# Altium PCB 数粒机接收板12通道.PcbDoc (part 1 of 2)
Units mil, origin at the board's own origin, x right, y up, seen from the top; angles counter-clockwise.
Board outline 12834.65 x 2362.2 mil, 2 copper layers (Top Layer, Bottom Layer); 305 components, 115 nets, 805 pads, 274 vias.
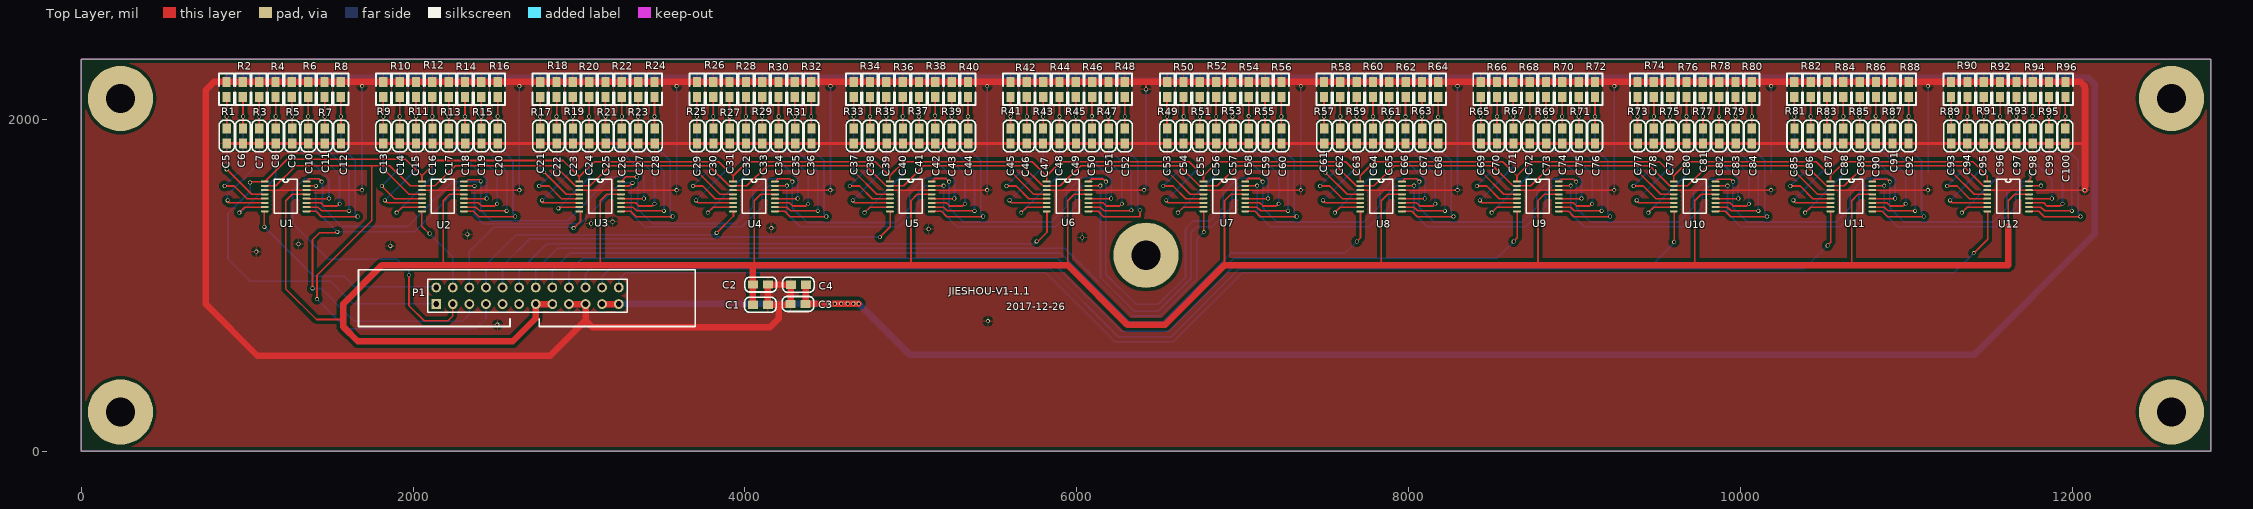
[diagram p0: Top Layer view]
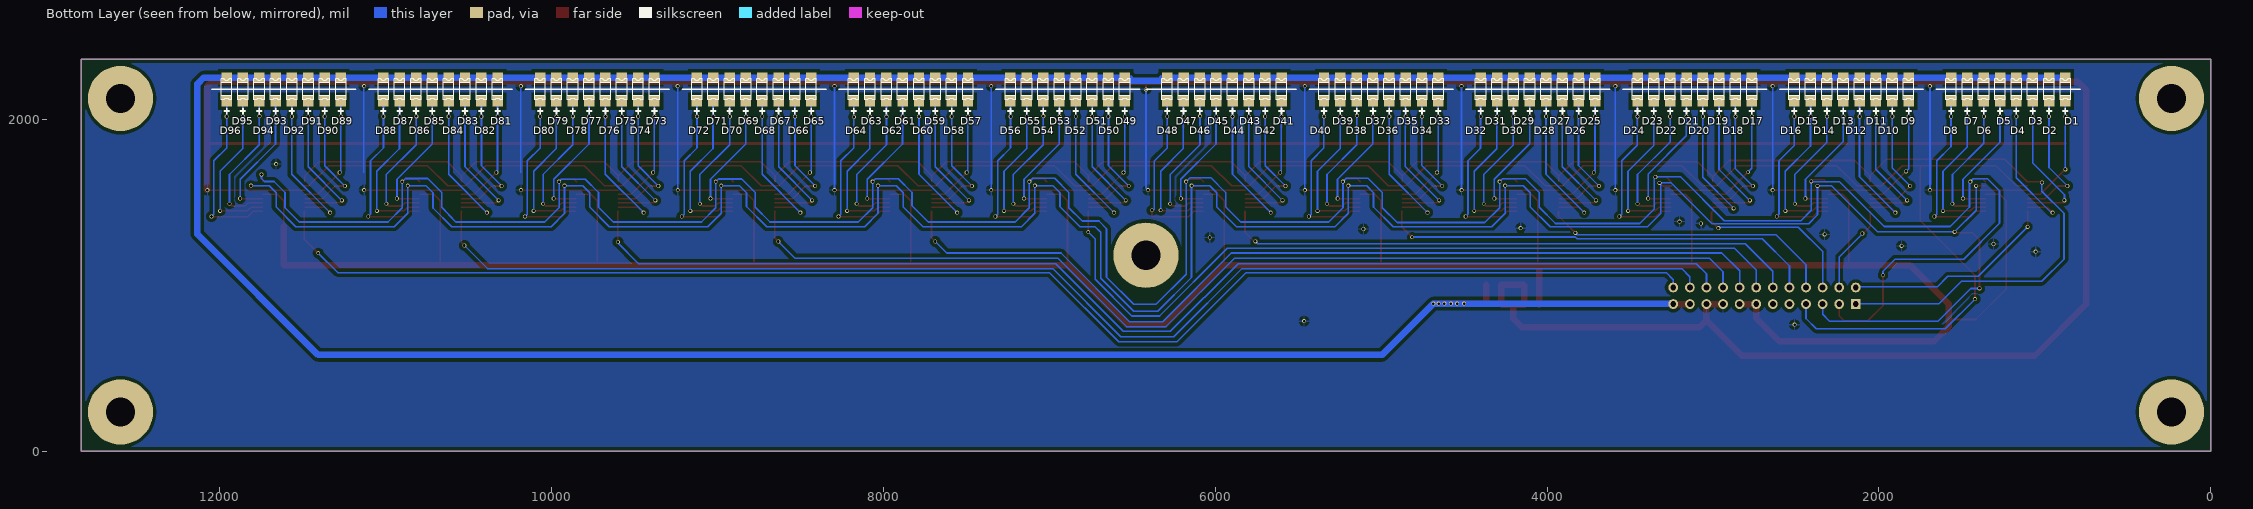
[diagram p1: Bottom Layer view, seen from below]

## Layer stack, top to bottom
Top Layer: signal copper 1.4
Dielectric: dielectric 12.6, FR-4, Dk 4.8
Bottom Layer: signal copper 1.4

## Board outline
12834.65,2362.2 0,2362.2 0,0 12834.65,0

## Design rules (kind name [scope] priority, off if disabled: settings)
Clearance Clearance_1 [InPolygon] p1: gap=20
Clearance [All] p2: gap=7.87
HoleSize [All] p1 off: absolutevalues=TRUE maxlimit=100 minlimit=1 maxpercent=80.000 minpercent=20.000
MinimumSolderMaskSliver [All] p1 off: minsoldermaskwidth=7.87
PolygonConnect [All] p1: connectstyle=Relief reliefconductorwidth=10 reliefentries=4 polygonreliefangle="90 Angle"
RoutingVias [All] p1: holewidth=10 width=23.62 viastyle="Through Hole" minholewidth=10 minwidth=23.62 maxholewidth=10 maxwidth=23.62
SilkToSilkClearance [All] p1: silktosilkclearance=-393.7
SilkscreenOverComponentPads [All] p1: minsilkscreentomaskgap=0
SolderMaskExpansion [All] p1: expansion=4
TestPointUsage [All] p1: valid=0 allowmultiple=FALSE
Testpoint [All] p1: side=3 testpointundercomponent=TRUE minsize=40 maxsize=100 preferedsize=60 minholesize=0 maxholesize=40 preferedholesize=32 testpointgrid=1 style=297 order=0-112345678
Width [All] p1: maxlimit=78.74 minlimit=10 preferedwidth=10
20 further rules are at their usual default settings.

## Components (designator, comment, footprint, x,y, rotation, side; value= is the part's Value field where it differs from the comment)
C1 "贴片电容 10uf" 0805c 4137.86,882.32 r180 top
C2 "贴片电容 0.1uf" 0805c 4139.86,1004.32 r180 top
C3 "贴片电容 10uf" 0805c 4274.86,887.32 r0 top
C4 "贴片电容 0.1uf" 0805c 4276.86,1003.32 r0 top
C5 "贴片电容 0.1uf" 0805c 876.78,1855 r90 top
C6 "贴片电容 0.1uf" 0805c 975.2,1855 r90 top
C7 "贴片电容 0.1uf" 0805c 1073.63,1855 r90 top
C8 "贴片电容 0.1uf" 0805c 1172.05,1855 r90 top
C9 "贴片电容 0.1uf" 0805c 1271,1855 r90 top
C10 "贴片电容 0.1uf" 0805c 1368.9,1855 r90 top
C11 "贴片电容 0.1uf" 0805c 1467.33,1855 r90 top
C12 "贴片电容 0.1uf" 0805c 1565.75,1855 r90 top
C13 "贴片电容 0.1uf" 0805c 1820.67,1855 r90 top
C14 "贴片电容 0.1uf" 0805c 1920.12,1855 r90 top
C15 "贴片电容 0.1uf" 0805c 2018.12,1855 r90 top
C16 "贴片电容 0.1uf" 0805c 2117.12,1855 r90 top
C17 "贴片电容 0.1uf" 0805c 2215.12,1855 r90 top
C18 "贴片电容 0.1uf" 0805c 2314.12,1855 r90 top
C19 "贴片电容 0.1uf" 0805c 2412.12,1855 r90 top
C20 "贴片电容 0.1uf" 0805c 2510.12,1855 r90 top
C21 "贴片电容 0.1uf" 0805c 2766.12,1855 r90 top
C22 "贴片电容 0.1uf" 0805c 2865.12,1855 r90 top
C23 "贴片电容 0.1uf" 0805c 2964.12,1855 r90 top
C24 "贴片电容 0.1uf" 0805c 3062.12,1855 r90 top
C25 "贴片电容 0.1uf" 0805c 3160.56,1855 r90 top
C26 "贴片电容 0.1uf" 0805c 3258.12,1855 r90 top
C27 "贴片电容 0.1uf" 0805c 3357.03,1855 r90 top
C28 "贴片电容 0.1uf" 0805c 3456.03,1855 r90 top
C29 "贴片电容 0.1uf" 0805c 3711.42,1855 r90 top
C30 "贴片电容 0.1uf" 0805c 3810.12,1855 r90 top
C31 "贴片电容 0.1uf" 0805c 3908.12,1855 r90 top
C32 "贴片电容 0.1uf" 0805c 4006.3,1855 r90 top
C33 "贴片电容 0.1uf" 0805c 4105.12,1855 r90 top
C34 "贴片电容 0.1uf" 0805c 4204.12,1855 r90 top
C35 "贴片电容 0.1uf" 0805c 4303.12,1855 r90 top
C36 "贴片电容 0.1uf" 0805c 4401.12,1855 r90 top
C37 "贴片电容 0.1uf" 0805c 4656.3,1855 r90 top
C38 "贴片电容 0.1uf" 0805c 4755.12,1855 r90 top
C39 "贴片电容 0.1uf" 0805c 4854.12,1855 r90 top
C40 "贴片电容 0.1uf" 0805c 4952.12,1855 r90 top
C41 "贴片电容 0.1uf" 0805c 5050.19,1855 r90 top
C42 "贴片电容 0.1uf" 0805c 5147.12,1855 r90 top
C43 "贴片电容 0.1uf" 0805c 5247.19,1855 r90 top
C44 "贴片电容 0.1uf" 0805c 5345.12,1855 r90 top
C45 "贴片电容 0.1uf" 0805c 5601.19,1855 r90 top
C46 "贴片电容 0.1uf" 0805c 5698.07,1855 r90 top
C47 "贴片电容 0.1uf" 0805c 5797.07,1855 r90 top
C48 "贴片电容 0.1uf" 0805c 5896.07,1855 r90 top
C49 "贴片电容 0.1uf" 0805c 5995.07,1855 r90 top
C50 "贴片电容 0.1uf" 0805c 6092.07,1855 r90 top
C51 "贴片电容 0.1uf" 0805c 6192.07,1855 r90 top
C52 "贴片电容 0.1uf" 0805c 6289.07,1855 r90 top
C53 "贴片电容 0.1uf" 0805c 6546.07,1855 r90 top
C54 "贴片电容 0.1uf" 0805c 6642.95,1855 r90 top
C55 "贴片电容 0.1uf" 0805c 6741.95,1855 r90 top
C56 "贴片电容 0.1uf" 0805c 6840.95,1855 r90 top
C57 "贴片电容 0.1uf" 0805c 6939.95,1855 r90 top
C58 "贴片电容 0.1uf" 0805c 7036.95,1855 r90 top
C59 "贴片电容 0.1uf" 0805c 7136.95,1855 r90 top
C60 "贴片电容 0.1uf" 0805c 7233.95,1855 r90 top
C61 "贴片电容 0.1uf" 0805c 7490.95,1855 r90 top
C62 "贴片电容 0.1uf" 0805c 7587.83,1855 r90 top
C63 "贴片电容 0.1uf" 0805c 7686.83,1855 r90 top
C64 "贴片电容 0.1uf" 0805c 7785.83,1855 r90 top
C65 "贴片电容 0.1uf" 0805c 7884.83,1855 r90 top
C66 "贴片电容 0.1uf" 0805c 7981.83,1855 r90 top
C67 "贴片电容 0.1uf" 0805c 8081.83,1855 r90 top
C68 "贴片电容 0.1uf" 0805c 8178.83,1855 r90 top
C69 "贴片电容 0.1uf" 0805c 8435.83,1855 r90 top
C70 "贴片电容 0.1uf" 0805c 8532.71,1855 r90 top
C71 "贴片电容 0.1uf" 0805c 8631.71,1855 r90 top
C72 "贴片电容 0.1uf" 0805c 8730.71,1855 r90 top
C73 "贴片电容 0.1uf" 0805c 8829.71,1855 r90 top
C74 "贴片电容 0.1uf" 0805c 8926.71,1855 r90 top
C75 "贴片电容 0.1uf" 0805c 9026.71,1855 r90 top
C76 "贴片电容 0.1uf" 0805c 9123.71,1855 r90 top
C77 "贴片电容 0.1uf" 0805c 9380.71,1855 r90 top
C78 "贴片电容 0.1uf" 0805c 9477.6,1855 r90 top
C79 "贴片电容 0.1uf" 0805c 9576.6,1855 r90 top
C80 "贴片电容 0.1uf" 0805c 9675.6,1855 r90 top
C81 "贴片电容 0.1uf" 0805c 9774.6,1855 r90 top
C82 "贴片电容 0.1uf" 0805c 9871.6,1855 r90 top
C83 "贴片电容 0.1uf" 0805c 9971.6,1855 r90 top
C84 "贴片电容 0.1uf" 0805c 10068.6,1855 r90 top
C85 "贴片电容 0.1uf" 0805c 10325.6,1855 r90 top
C86 "贴片电容 0.1uf" 0805c 10422.48,1855 r90 top
C87 "贴片电容 0.1uf" 0805c 10521.48,1855 r90 top
C88 "贴片电容 0.1uf" 0805c 10620.48,1855 r90 top
C89 "贴片电容 0.1uf" 0805c 10719.48,1855 r90 top
C90 "贴片电容 0.1uf" 0805c 10816.48,1855 r90 top
C91 "贴片电容 0.1uf" 0805c 10916.48,1855 r90 top
C92 "贴片电容 0.1uf" 0805c 11013.48,1855 r90 top
C93 "贴片电容 0.1uf" 0805c 11270.48,1855 r90 top
C94 "贴片电容 0.1uf" 0805c 11367.36,1855 r90 top
C95 "贴片电容 0.1uf" 0805c 11466.36,1855 r90 top
C96 "贴片电容 0.1uf" 0805c 11565.36,1855 r90 top
C97 "贴片电容 0.1uf" 0805c 11664.36,1855 r90 top
C98 "贴片电容 0.1uf" 0805c 11761.36,1855 r90 top
C99 "贴片电容 0.1uf" 0805c 11861.36,1855 r90 top
C100 "贴片电容 0.1uf" 0805c 11958.36,1855 r90 top
D1 "红外接收珠子" jieshou1206 875.98,2110.24 r0 bottom
D2 "红外接收珠子" jieshou1206 974.41,2110.24 r0 bottom
D3 "红外接收珠子" jieshou1206 1072.83,2110.24 r0 bottom
D4 "红外接收珠子" jieshou1206 1171.26,2110.24 r0 bottom
D5 "红外接收珠子" jieshou1206 1269.68,2110.24 r0 bottom
D6 "红外接收珠子" jieshou1206 1368.11,2110.24 r0 bottom
D7 "红外接收珠子" jieshou1206 1466.53,2110.24 r0 bottom
D8 "红外接收珠子" jieshou1206 1564.96,2110.24 r0 bottom
D9 "红外接收珠子" jieshou1206 1820.87,2110.24 r0 bottom
D10 "红外接收珠子" jieshou1206 1919.29,2110.24 r0 bottom
D11 "红外接收珠子" jieshou1206 2017.72,2110.24 r0 bottom
D12 "红外接收珠子" jieshou1206 2116.14,2110.24 r0 bottom
D13 "红外接收珠子" jieshou1206 2214.57,2110.24 r0 bottom
D14 "红外接收珠子" jieshou1206 2312.99,2110.24 r0 bottom
D15 "红外接收珠子" jieshou1206 2411.42,2110.24 r0 bottom
D16 "红外接收珠子" jieshou1206 2509.84,2110.24 r0 bottom
D17 "红外接收珠子" jieshou1206 2765.75,2110.24 r0 bottom
D18 "红外接收珠子" jieshou1206 2864.17,2110.24 r0 bottom
D19 "红外接收珠子" jieshou1206 2962.6,2110.24 r0 bottom
D20 "红外接收珠子" jieshou1206 3061.02,2110.24 r0 bottom
D21 "红外接收珠子" jieshou1206 3159.45,2110.24 r0 bottom
D22 "红外接收珠子" jieshou1206 3257.87,2110.24 r0 bottom
D23 "红外接收珠子" jieshou1206 3356.3,2110.24 r0 bottom
D24 "红外接收珠子" jieshou1206 3454.72,2110.24 r0 bottom
D25 "红外接收珠子" jieshou1206 3710.63,2110.24 r0 bottom
D26 "红外接收珠子" jieshou1206 3809.05,2110.24 r0 bottom
D27 "红外接收珠子" jieshou1206 3907.48,2110.24 r0 bottom
D28 "红外接收珠子" jieshou1206 4005.91,2110.24 r0 bottom
D29 "红外接收珠子" jieshou1206 4104.33,2110.24 r0 bottom
D30 "红外接收珠子" jieshou1206 4202.76,2110.24 r0 bottom
D31 "红外接收珠子" jieshou1206 4301.18,2110.24 r0 bottom
D32 "红外接收珠子" jieshou1206 4399.61,2110.24 r0 bottom
D33 "红外接收珠子" jieshou1206 4655.51,2110.24 r0 bottom
D34 "红外接收珠子" jieshou1206 4753.94,2110.24 r0 bottom
D35 "红外接收珠子" jieshou1206 4852.36,2110.24 r0 bottom
D36 "红外接收珠子" jieshou1206 4950.79,2110.24 r0 bottom
D37 "红外接收珠子" jieshou1206 5049.21,2110.24 r0 bottom
D38 "红外接收珠子" jieshou1206 5147.64,2110.24 r0 bottom
D39 "红外接收珠子" jieshou1206 5246.06,2110.24 r0 bottom
D40 "红外接收珠子" jieshou1206 5344.49,2110.24 r0 bottom
D41 "红外接收珠子" jieshou1206 5600.39,2110.24 r0 bottom
D42 "红外接收珠子" jieshou1206 5698.82,2110.24 r0 bottom
D43 "红外接收珠子" jieshou1206 5797.24,2110.24 r0 bottom
D44 "红外接收珠子" jieshou1206 5895.67,2110.24 r0 bottom
D45 "红外接收珠子" jieshou1206 5994.09,2110.24 r0 bottom
D46 "红外接收珠子" jieshou1206 6092.52,2110.24 r0 bottom
D47 "红外接收珠子" jieshou1206 6190.94,2110.24 r0 bottom
D48 "红外接收珠子" jieshou1206 6289.37,2110.24 r0 bottom
D49 "红外接收珠子" jieshou1206 6545.28,2110.24 r0 bottom
D50 "红外接收珠子" jieshou1206 6643.7,2110.24 r0 bottom
D51 "红外接收珠子" jieshou1206 6742.13,2110.24 r0 bottom
D52 "红外接收珠子" jieshou1206 6840.55,2110.24 r0 bottom
D53 "红外接收珠子" jieshou1206 6938.98,2110.24 r0 bottom
D54 "红外接收珠子" jieshou1206 7037.4,2110.24 r0 bottom
D55 "红外接收珠子" jieshou1206 7135.83,2110.24 r0 bottom
D56 "红外接收珠子" jieshou1206 7234.25,2110.24 r0 bottom
D57 "红外接收珠子" jieshou1206 7490.16,2110.24 r0 bottom
D58 "红外接收珠子" jieshou1206 7588.58,2110.24 r0 bottom
D59 "红外接收珠子" jieshou1206 7687.01,2110.24 r0 bottom
D60 "红外接收珠子" jieshou1206 7785.43,2110.24 r0 bottom
D61 "红外接收珠子" jieshou1206 7883.86,2110.24 r0 bottom
D62 "红外接收珠子" jieshou1206 7982.28,2110.24 r0 bottom
D63 "红外接收珠子" jieshou1206 8080.71,2110.24 r0 bottom
D64 "红外接收珠子" jieshou1206 8179.13,2110.24 r0 bottom
D65 "红外接收珠子" jieshou1206 8435.04,2110.24 r0 bottom
D66 "红外接收珠子" jieshou1206 8533.46,2110.24 r0 bottom
D67 "红外接收珠子" jieshou1206 8631.89,2110.24 r0 bottom
D68 "红外接收珠子" jieshou1206 8730.32,2110.24 r0 bottom
D69 "红外接收珠子" jieshou1206 8828.74,2110.24 r0 bottom
D70 "红外接收珠子" jieshou1206 8927.17,2110.24 r0 bottom
D71 "红外接收珠子" jieshou1206 9025.59,2110.24 r0 bottom
D72 "红外接收珠子" jieshou1206 9124.02,2110.24 r0 bottom
D73 "红外接收珠子" jieshou1206 9379.92,2110.24 r0 bottom
D74 "红外接收珠子" jieshou1206 9478.35,2110.24 r0 bottom
D75 "红外接收珠子" jieshou1206 9576.77,2110.24 r0 bottom
D76 "红外接收珠子" jieshou1206 9675.2,2110.24 r0 bottom
D77 "红外接收珠子" jieshou1206 9773.62,2110.24 r0 bottom
D78 "红外接收珠子" jieshou1206 9872.05,2110.24 r0 bottom
D79 "红外接收珠子" jieshou1206 9970.47,2110.24 r0 bottom
D80 "红外接收珠子" jieshou1206 10068.9,2110.24 r0 bottom
D81 "红外接收珠子" jieshou1206 10324.8,2110.24 r0 bottom
D82 "红外接收珠子" jieshou1206 10423.23,2110.24 r0 bottom
D83 "红外接收珠子" jieshou1206 10521.65,2110.24 r0 bottom
D84 "红外接收珠子" jieshou1206 10620.08,2110.24 r0 bottom
D85 "红外接收珠子" jieshou1206 10718.5,2110.24 r0 bottom
D86 "红外接收珠子" jieshou1206 10816.93,2110.24 r0 bottom
D87 "红外接收珠子" jieshou1206 10915.35,2110.24 r0 bottom
D88 "红外接收珠子" jieshou1206 11013.78,2110.24 r0 bottom
D89 "红外接收珠子" jieshou1206 11269.69,2110.24 r0 bottom
D90 "红外接收珠子" jieshou1206 11368.11,2110.24 r0 bottom
D91 "红外接收珠子" jieshou1206 11466.54,2110.24 r0 bottom
D92 "红外接收珠子" jieshou1206 11564.96,2110.24 r0 bottom
D93 "红外接收珠子" jieshou1206 11663.39,2110.24 r0 bottom
D94 "红外接收珠子" jieshou1206 11761.81,2110.24 r0 bottom
D95 "红外接收珠子" jieshou1206 11860.24,2110.24 r0 bottom
D96 "红外接收珠子" jieshou1206 11958.66,2110.24 r0 bottom
P1 "牛角插座" HDR2X12 2139.3,886.61 r0 top
R1 "贴片电阻" 0805r 875.67,2226.1 r270 top
R2 "贴片电阻" 0805r 974.1,2226.1 r270 top
R3 "贴片电阻" 0805r 1072.52,2226.1 r270 top
R4 "贴片电阻" 0805r 1170.95,2226.1 r270 top
R5 "贴片电阻" 0805r 1269.37,2226.1 r270 top
R6 "贴片电阻" 0805r 1367.8,2226.1 r270 top
R7 "贴片电阻" 0805r 1466.22,2226.1 r270 top
R8 "贴片电阻" 0805r 1564.65,2226.1 r270 top
R9 "贴片电阻" 0805r 1820.87,2226.1 r270 top
R10 "贴片电阻" 0805r 1919.29,2226.1 r270 top
R11 "贴片电阻" 0805r 2017.72,2226.1 r270 top
R12 "贴片电阻" 0805r 2116.14,2226.1 r270 top
R13 "贴片电阻" 0805r 2214.57,2226.1 r270 top
R14 "贴片电阻" 0805r 2312.99,2226.1 r270 top
R15 "贴片电阻" 0805r 2411.42,2226.1 r270 top
R16 "贴片电阻" 0805r 2509.84,2226.1 r270 top
R17 "贴片电阻" 0805r 2765.75,2226.1 r270 top
R18 "贴片电阻" 0805r 2864.17,2226.1 r270 top
R19 "贴片电阻" 0805r 2962.6,2226.1 r270 top
R20 "贴片电阻" 0805r 3061.02,2226.1 r270 top
R21 "贴片电阻" 0805r 3159.45,2226.1 r270 top
R22 "贴片电阻" 0805r 3257.87,2226.1 r270 top
R23 "贴片电阻" 0805r 3356.3,2226.1 r270 top
R24 "贴片电阻" 0805r 3454.72,2226.1 r270 top
R25 "贴片电阻" 0805r 3710.63,2226.1 r270 top
R26 "贴片电阻" 0805r 3809.05,2226.1 r270 top
R27 "贴片电阻" 0805r 3907.48,2226.1 r270 top
R28 "贴片电阻" 0805r 4005.9,2226.1 r270 top
R29 "贴片电阻" 0805r 4104.33,2226.1 r270 top
R30 "贴片电阻" 0805r 4202.76,2226.1 r270 top
R31 "贴片电阻" 0805r 4301.18,2226.1 r270 top
R32 "贴片电阻" 0805r 4399.61,2226.1 r270 top
R33 "贴片电阻" 0805r 4655.51,2226.1 r270 top
R34 "贴片电阻" 0805r 4753.94,2226.1 r270 top
R35 "贴片电阻" 0805r 4852.36,2226.1 r270 top
R36 "贴片电阻" 0805r 4950.79,2226.1 r270 top
R37 "贴片电阻" 0805r 5049.21,2226.1 r270 top
R38 "贴片电阻" 0805r 5147.64,2226.1 r270 top
R39 "贴片电阻" 0805r 5246.06,2226.1 r270 top
R40 "贴片电阻" 0805r 5344.49,2226.1 r270 top
R41 "贴片电阻" 0805r 5600.39,2226.1 r270 top
R42 "贴片电阻" 0805r 5698.82,2226.1 r270 top
R43 "贴片电阻" 0805r 5797.24,2226.1 r270 top
R44 "贴片电阻" 0805r 5895.67,2226.1 r270 top
R45 "贴片电阻" 0805r 5994.09,2226.1 r270 top
R46 "贴片电阻" 0805r 6092.52,2226.1 r270 top
R47 "贴片电阻" 0805r 6190.94,2226.1 r270 top
R48 "贴片电阻" 0805r 6289.37,2226.1 r270 top
R49 "贴片电阻" 0805r 6545.28,2226.1 r270 top
R50 "贴片电阻" 0805r 6643.7,2226.1 r270 top
R51 "贴片电阻" 0805r 6742.13,2226.1 r270 top
R52 "贴片电阻" 0805r 6840.55,2226.1 r270 top
R53 "贴片电阻" 0805r 6938.98,2226.1 r270 top
R54 "贴片电阻" 0805r 7037.4,2226.1 r270 top
R55 "贴片电阻" 0805r 7135.83,2226.1 r270 top
R56 "贴片电阻" 0805r 7234.25,2226.1 r270 top
R57 "贴片电阻" 0805r 7490.16,2226.1 r270 top
R58 "贴片电阻" 0805r 7588.58,2226.1 r270 top
R59 "贴片电阻" 0805r 7687.01,2226.1 r270 top
R60 "贴片电阻" 0805r 7785.43,2226.1 r270 top
R61 "贴片电阻" 0805r 7883.86,2226.1 r270 top
R62 "贴片电阻" 0805r 7982.28,2226.1 r270 top
R63 "贴片电阻" 0805r 8080.71,2226.1 r270 top
R64 "贴片电阻" 0805r 8179.13,2226.1 r270 top
R65 "贴片电阻" 0805r 8434.73,2226.1 r270 top
R66 "贴片电阻" 0805r 8533.15,2226.1 r270 top
R67 "贴片电阻" 0805r 8631.58,2226.1 r270 top
R68 "贴片电阻" 0805r 8730,2226.1 r270 top
R69 "贴片电阻" 0805r 8828.43,2226.1 r270 top
R70 "贴片电阻" 0805r 8926.85,2226.1 r270 top
R71 "贴片电阻" 0805r 9025.28,2226.1 r270 top
R72 "贴片电阻" 0805r 9123.7,2226.1 r270 top
R73 "贴片电阻" 0805r 9379.92,2226.1 r270 top
R74 "贴片电阻" 0805r 9478.35,2226.1 r270 top
R75 "贴片电阻" 0805r 9576.77,2226.1 r270 top
R76 "贴片电阻" 0805r 9675.2,2226.1 r270 top
R77 "贴片电阻" 0805r 9773.62,2226.1 r270 top
R78 "贴片电阻" 0805r 9872.05,2226.1 r270 top
R79 "贴片电阻" 0805r 9970.47,2226.1 r270 top
R80 "贴片电阻" 0805r 10068.9,2226.1 r270 top
R81 "贴片电阻" 0805r 10324.8,2226.1 r270 top
R82 "贴片电阻" 0805r 10423.23,2226.1 r270 top
R83 "贴片电阻" 0805r 10521.65,2226.1 r270 top
R84 "贴片电阻" 0805r 10620.08,2226.1 r270 top
R85 "贴片电阻" 0805r 10718.5,2226.1 r270 top
R86 "贴片电阻" 0805r 10816.93,2226.1 r270 top
R87 "贴片电阻" 0805r 10915.35,2226.1 r270 top
R88 "贴片电阻" 0805r 11013.78,2226.1 r270 top
R89 "贴片电阻" 0805r 11269.69,2226.1 r270 top
R90 "贴片电阻" 0805r 11368.11,2226.1 r270 top
R91 "贴片电阻" 0805r 11466.54,2226.1 r270 top
R92 "贴片电阻" 0805r 11564.96,2226.1 r270 top
R93 "贴片电阻" 0805r 11663.39,2226.1 r270 top
R94 "贴片电阻" 0805r 11761.81,2226.1 r270 top
R95 "贴片电阻" 0805r 11860.24,2226.1 r270 top
R96 "贴片电阻" 0805r 11958.66,2226.1 r270 top
U1 "集成电路" TSSOP16 1105.86,1624.72 r0 top
U2 "集成电路" TSSOP16 2053.86,1624.72 r0 top
U3 "集成电路" TSSOP16 3001.86,1624.72 r0 top
U4 "集成电路" TSSOP16 3928.86,1624.72 r0 top
U5 "集成电路" TSSOP16 4873.74,1624.72 r0 top
U6 "集成电路" TSSOP16 5818.63,1624.72 r0 top
U7 "集成电路" TSSOP16 6763.51,1624.72 r0 top
U8 "集成电路" TSSOP16 7708.39,1624.72 r0 top
U9 "集成电路" TSSOP16 8653.27,1624.72 r0 top
U10 "集成电路" TSSOP16 9598.15,1624.72 r0 top
U11 "集成电路" TSSOP16 10543.04,1624.72 r0 top
U12 "集成电路" TSSOP16 11487.92,1624.72 r0 top

## Footprints (in the part's own frame and the unit in brackets; to place one, negate y for a bottom-side part, rotate by r counter-clockwise, add the part's x,y. Pads: shape width x height; smd on the part's side, far side on the other; paste and mask are expansions set on the pad)
0805c [mil]
  rect 60x50 smd: 1(0,0) 2(90,0)
  silkscreen extent -50,-45 140,45
0805r [mil]
  rect 60x50 smd: 1(0,0) 2(90,0)
  silkscreen extent -50,-45 140,45
HDR2X12 [mm] "Connector; Header; 12x2 Position"
  rect 1.5x1.5 hole 0.9: 1(0,0)
  round 1.5 hole 0.9: 2(0,2.54) 3(2.54,0) 4(2.54,2.54) 5(5.08,0) 6(5.08,2.54) 7(7.62,0) 8(7.62,2.54) 9(10.16,0) 10(10.16,2.54) 11(12.7,0) 12(12.7,2.54) 13(15.24,0) 14(15.24,2.54) 15(17.78,0) 16(17.78,2.54) 17(20.32,0) 18(20.32,2.54) 19(22.86,0) 20(22.86,2.54) 21(25.4,0) 22(25.4,2.54) 23(27.94,0) 24(27.94,2.54)
  silkscreen extent -1.27,-1.27 29.21,3.81
jieshou1206 [mm]
  rect 1.6x1.6 smd: 1(0,0) 2(0,-3.6)
  silkscreen extent -0.8,-3.41 0.82,1.9
TSSOP16 [mm] "ADG708"
  rect 1.2x0.3 smd: 1(0,0)
  oval 1.2x0.3 smd: 2(0,-0.65) 3(0,-1.3) 4(0,-1.95) 5(0,-2.6) 6(0,-3.25) 7(0,-3.9) 8(0,-4.55) 9(6.4,-4.55) 10(6.4,-3.9) 11(6.4,-3.25) 12(6.4,-2.6) 13(6.4,-1.95) 14(6.4,-1.3) 15(6.4,-0.65) 16(6.4,0)
  silkscreen extent 1.43,-4.88 4.96,0.33

## Part data
C1 C2 C3 C4: library part Cap, "Capacitor"
C5 C6 C7 C8 C9 C10 C11 C12 C13 C14 C15 C16 C17 C18 C19 C20 C21 C22 C23 C24 C25 C26 C27 C28 C29 C30 C31 C32 C33 C34 C35 C36 C37 C38 C39 C40 C41 C42 C43 C44 C45 C46 C47 C48 C49 C50 C51 C52 C53 C54 C55 C56 C57 C58 C59 C60 C61 C62 C63 C64 C65 C66 C67 C68 C69 C70 C71 C72 C73 C74 C75 C76 C77 C78 C79 C80 C81 C82 C83 C84 C85 C86 C87 C88 C89 C90 C91 C92 C93 C94 C95 C96 C97 C98 C99 C100: library part Cap, "Capacitor 0.1uf"
D1 D2 D3 D4 D5 D6 D7 D8 D9 D10 D11 D12 D13 D14 D15 D16 D17 D18 D19 D20 D21 D22 D23 D24 D25 D26 D27 D28 D29 D30 D31 D32 D33 D34 D35 D36 D37 D38 D39 D40 D41 D42 D43 D44 D45 D46 D47 D48 D49 D50 D51 D52 D53 D54 D55 D56 D57 D58 D59 D60 D61 D62 D63 D64 D65 D66 D67 D68 D69 D70 D71 D72 D73 D74 D75 D76 D77 D78 D79 D80 D81 D82 D83 D84 D85 D86 D87 D88 D89 D90 D91 D92 D93 D94 D95 D96: library part LED0, "PD15-21B/TR8"
P1: library part "Header 12X2", "Header, 12-Pin, Dual row"
R1 R2 R3 R4 R5 R6 R7 R8 R9 R10 R11 R12 R13 R14 R15 R16 R17 R18 R19 R20 R21 R22 R23 R24 R25 R26 R27 R28 R29 R30 R31 R32: library part Res3
R33 R34 R35 R36 R37 R38 R39 R40 R41 R42 R43 R44 R45 R46 R47 R48 R49 R50 R51 R52 R53 R54 R55 R56 R57 R58 R59 R60 R61 R62 R63 R64 R65 R66 R67 R68 R69 R70 R71 R72 R73 R74 R75 R76 R77 R78 R79 R80 R81 R82 R83 R84 R85 R86 R87 R88 R89 R90 R91 R92 R93 R94 R95 R96: library part Res3, "电阻"
U1 U2 U3 U4: library part ADG708
U5 U6 U7 U8 U9 U10 U11 U12: library part ADG708, "ADG708BRU-REEL"

## Free pads (board coordinates)
  round 393.7 hole 177.17 unplated: 1(236.22,2125.98) 2(236.22,236.22) 2(6417.32,1181.1) 5(12598.43,2125.98) 6(12598.43,236.22)

## Via types
v1: diameter 23.62, hole 15.75, Top Layer to Bottom Layer, 274 vias

## Nets (pads, with @x,y where several pads share a name; then routed paths per layer and width w, separated by ;. In a path a pad name is that pad's centre, name@x,y a point inside that pad or via, vN(x,y) a via of type N, cw(c..) or ccw(c..) an arc to the next point about the centre after c; other vN are vias at no path point)
A0: P1.1 U1.1 U2.1 U3.1 U4.1 U5.1 U6.1 U7.1 U8.1 U9.1 U10.1 U11.1 U12.1 | length 13806.2
  Top Layer w10: v1(1016.86,1619.32) 1022.26,1624.72 U1.1@1105.86,1624.72 1241.46,1760.32 1953.86,1760.32 2053.86,1660.32 ; U2.1@2053.86,1624.72 2053.86,1660.32 ; U3.1@3001.86,1624.72 3001.86,1654.32 ; U4.1@3928.86,1624.72 3928.86,1660.17 4014.01,1745.32 4787.48,1745.32 4873.74,1659.05 ; 3928.86,1659.05 3842.6,1745.32 3092.86,1745.32 3001.86,1654.32 ; 5818.63,1659.05 5732.36,1745.32 4958.89,1745.32 4873.74,1660.17 ; 6763.51,1659.05 6677.24,1745.32 5903.78,1745.32 5818.63,1660.17 ; 7708.39,1659.05 7622.12,1745.32 6848.66,1745.32 6763.51,1660.17 ; 8653.27,1659.05 8567.01,1745.32 7793.54,1745.32 7708.39,1660.17 ; 9598.15,1659.05 9511.89,1745.32 8738.42,1745.32 8653.27,1660.17 ; 10543.04,1659.05 10456.77,1745.32 9683.3,1745.32 9598.15,1660.17 ; U12.1@11487.92,1624.72 11487.92,1660.17 ; 11487.92,1659.05 11401.65,1745.32 10628.19,1745.32 10543.04,1660.17 ; 2053.86,1660.32 2145.86,1752.32 2903.86,1752.32 3001.86,1654.32 ; 4873.74,1660.17 U5.1@4873.74,1624.72 4873.74,1660.17 ; 5818.63,1660.17 U6.1@5818.63,1624.72 5818.63,1660.17 ; 6763.51,1660.17 U7.1@6763.51,1624.72 6763.51,1660.17 ; 7708.39,1660.17 U8.1@7708.39,1624.72 7708.39,1660.17 ; 8653.27,1660.17 U9.1@8653.27,1624.72 8653.27,1660.17 ; 9598.15,1660.17 U10.1@9598.15,1624.72 9598.15,1660.17 ; 10543.04,1660.17 U11.1@10543.04,1624.72 10543.04,1660.17
  Bottom Layer w10: v1(1016.86,1619.32) 1017.86,1618.32 1017.86,1567.32 884.86,1434.32 884.86,1157.32 1018.86,1023.32 1502.6,1023.32 1636.3,889.61 P1.1@2139.3,889.61
A1: P1.3 U1.16 U2.16 U3.16 U4.16 U5.16 U6.16 U7.16 U8.16 U9.16 U10.16 U11.16 U12.16 | length 18193
  Top Layer w10: U1.16@1357.83,1624.72 1374.59,1641.48 1431.7,1641.48 v1(1448.86,1624.32) ; v1(1975.3,1060.61) 1975.3,876.61 2066.3,785.61 2210.3,785.61 2239.3,814.61 P1.3@2239.3,886.61 ; U2.16@2305.83,1624.72 2320.36,1624.72 2331.12,1635.48 2398.12,1635.48 2405.46,1628.13 v1@2405.46,1624.72 ; U3.16@3253.83,1624.72 3283.59,1654.48 3345.12,1654.48 v1(3347.12,1652.48) ; U4.16@4180.83,1624.72 4197.59,1641.48 4268.7,1641.48 v1(4285.86,1624.32) ; U5.16@5125.71,1624.72 5144.47,1643.48 5211.59,1643.48 v1(5230.74,1624.32) ; U6.16@6070.59,1624.72 6086.35,1640.48 6159.47,1640.48 v1(6175.63,1624.32) ; U7.16@7015.48,1624.72 7034.23,1643.48 7101.35,1643.48 v1(7120.51,1624.32) ; U8.16@7960.36,1624.72 7977.11,1641.48 8048.23,1641.48 v1(8065.39,1624.32) ; U9.16@8905.24,1624.72 8919,1638.48 8996.11,1638.48 v1(9010.27,1624.32) ; U10.16@9850.12,1624.72 9863.88,1638.48 9941,1638.48 v1(9955.15,1624.32) ; U11.16@10795,1624.72 10809.76,1639.48 10884.88,1639.48 v1(10900.04,1624.32) ; U12.16@11739.89,1624.72 11739.89,1637.32 11749.22,1646.65 11749.22,1666.38 v1(11748.12,1667.48)
  Bottom Layer w10: v1(1975.3,1060.61) 1975.3,1085.17 1903.15,1157.32 1488.86,1157.32 1272.86,1373.32 1272.86,1569.32 1345.02,1641.48 1431.7,1641.48 v1(1448.86,1624.32) 1453.86,1619.32 1453.86,1471.32 1570.86,1354.32 1966.86,1354.32 2237.26,1624.72 2406.26,1624.72 v1(2407.86,1626.32) 2407.86,1451.32 2469.55,1389.63 2931.18,1389.63 3196.02,1654.48 3353.86,1654.48 3353.86,1459.32 3441.18,1372 3949.54,1372 4047.86,1470.32 4047.86,1559.32 4130.02,1641.48 4268.7,1641.48 v1@4285.46,1624.72 ; v1@4285.46,1624.32 v1@4285.46,1624.72 ; v1(5230.74,1624.32) v1@5230.34,1624.72 ; v1(6175.63,1624.32) v1@6175.22,1624.72 ; v1(7120.51,1624.32) v1@7120.11,1624.72 ; v1(8065.39,1624.32) v1@8064.99,1624.72 ; v1(9010.27,1624.32) v1@9009.87,1624.72 ; v1(9955.15,1624.32) v1@9954.75,1624.72 ; v1(10900.04,1624.32) v1@10899.63,1624.72 ; v1(11748.12,1667.48) 11748.59,1667 11748.59,1643.8 11729.8,1625 11672.6,1625 11606.92,1559.32 11606.92,1467.05 11521.48,1381.61 10985.74,1381.61 10899.63,1467.72 v1@10899.63,1624.72 ; v1@4285.46,1624.72 v1(4285.86,1624.32) 4285.86,1467.32 4375.18,1378 4903.69,1378 4992.74,1467.05 4992.74,1559.32 5078.9,1645.48 5209.59,1645.48 v1@5230.34,1624.72 ; v1@5230.34,1624.72 5230.34,1467.72 5316.45,1381.61 5846.3,1381.61 5937.63,1472.93 5937.63,1559.32 6025.78,1647.48 6152.47,1647.48 v1@6175.22,1624.72 ; v1@6175.22,1624.72 6175.22,1066.78 6357,885 6491,885 6655,1049 6655,1341 6701,1387 6801.56,1387 6882.51,1467.94 6882.51,1559.32 6967.67,1644.48 7100.35,1644.48 v1@7120.11,1624.72 ; v1@7120.11,1624.72 7120.11,1467.72 7206.22,1381.61 7730.3,1381.61 7827.39,1478.7 7827.39,1559.32 7910.55,1642.48 8047.23,1642.48 v1@8064.99,1624.72 ; v1@8064.99,1624.72 8064.99,1467.72 8151.1,1381.61 8683.3,1381.61 8772.27,1470.58 8772.27,1559.32 8853.43,1640.48 8994.11,1640.48 v1@9009.87,1624.72 ; v1@9009.87,1624.72 9009.87,1467.72 9095.98,1381.61 9628.3,1381.61 9717.15,1470.46 9717.15,1559.32 9796.31,1638.48 9941,1638.48 v1@9954.75,1624.72 ; v1@9954.75,1624.72 9954.75,1467.72 10040.86,1381.61 10576.6,1381.61 10662.04,1470.32 10662.04,1559.32 10746.19,1643.48 10880.88,1643.48 v1@10899.63,1624.72
A2: P1.5 U1.15 U2.15 U3.15 U4.15 U5.15 U6.15 U7.15 U8.15 U9.15 U10.15 U11.15 U12.15 | length 17454.2
  Top Layer w10: U1.15@1357.83,1599.13 v1(1413.67,1599.13) ; v1(1393.46,980.92) 1393.46,1274.77 1436.01,1317.32 1538.86,1317.32 v1(1543.86,1322.32) ; U2.15@2305.83,1599.13 v1(2369.86,1599.13) ; U3.15@3250.12,1598.48 3303.12,1598.48 v1(3322.12,1617.48) ; U4.15@4180.83,1599.13 4251.67,1599.13 v1(4252.86,1600.32) ; U5.15@5125.71,1599.13 5196.55,1599.13 v1(5197.74,1600.32) ; U6.15@6070.59,1599.13 6141.44,1599.13 v1(6142.63,1600.32) ; U7.15@7015.48,1599.13 7086.32,1599.13 v1(7087.51,1600.32) ; U8.15@7960.36,1599.13 8031.2,1599.13 v1(8032.39,1600.32) ; U9.15@8905.24,1599.13 8976.08,1599.13 v1(8977.27,1600.32) ; U10.15@9850.12,1599.13 9920.96,1599.13 v1(9922.15,1600.32) ; U11.15@10795,1599.13 10865.85,1599.13 v1(10867.04,1600.32) ; U12.15@11739.89,1599.13 11810.73,1599.13 v1(11811.92,1600.32)
  Bottom Layer w10: v1(1393.46,980.92) 1447,980.92 1644.3,783.61 2297.3,783.61 2339.3,825.61 P1.5@2339.3,886.61 ; v1(1413.67,1599.13) 1413.67,1452.51 v1(1543.86,1322.32) 2008.86,1322.32 2285.67,1599.13 v1(2369.86,1599.13) 2369.86,1424.32 2423.57,1370.61 3006.15,1370.61 3253.02,1617.48 v1(3322.12,1617.48) 3315.86,1611.22 3315.86,1430.32 3394.18,1352 3981.54,1352 4100.86,1471.32 4100.86,1557.32 4142.67,1599.13 4251.67,1599.13 v1(4252.86,1600.32) 4252.86,1433.32 4333.57,1352.61 4927.04,1352.61 5045.74,1471.32 5045.74,1557.32 5087.55,1599.13 5196.55,1599.13 v1(5197.74,1600.32) 5197.74,1433.32 5278.45,1352.61 5871.92,1352.61 5990.63,1471.32 5990.63,1557.32 6032.44,1599.13 6141.44,1599.13 v1(6142.63,1600.32) 6142.63,1047.37 6347,843 6491,843 6691,1043 6691,1319.49 6725,1353.49 6814.79,1353.49 6935.51,1474.21 6935.51,1557.32 6977.32,1599.13 7086.32,1599.13 v1(7087.51,1600.32) 7087.51,1433.32 7168.22,1352.61 7761.68,1352.61 7880.39,1471.32 7880.39,1557.32 7922.2,1599.13 8031.2,1599.13 v1(8032.39,1600.32) 8032.39,1433.32 8113.1,1352.61 8703.3,1352.61 8825.27,1474.58 8825.27,1557.32 8867.08,1599.13 8976.08,1599.13 v1(8977.27,1600.32) 8977.27,1433.32 9057.98,1352.61 9651.45,1352.61 9770.15,1471.32 9770.15,1557.32 9811.96,1599.13 9920.96,1599.13 v1(9922.15,1600.32) 9922.15,1433.32 10002.86,1352.61 10602.3,1352.61 10715.04,1465.34 10715.04,1557.32 10756.85,1599.13 10865.85,1599.13 v1(10867.04,1600.32) 10867.04,1433.32 10947.74,1352.61 11541.21,1352.61 11659.92,1471.32 11659.92,1557.32 11701.73,1599.13 11810.73,1599.13 v1(11811.92,1600.32)
CH1: P1.2 U1.8 | length 1278.9
  Top Layer w10: v1(1103.86,1352.32) 1103.86,1443.59 U1.8@1105.86,1445.59
  Bottom Layer w10: v1(1103.86,1352.32) 1401.57,1054.61 1584.3,1054.61 1647.3,991.61 P1.2@2139.3,991.61
CH1-1: C5.2 D1.1 R1.2 U1.4 | length 894.8
  Top Layer w10: R1.2@875.67,2136.1 876,2135.77 v1(876,2017) 876.78,2016.22 C5.2@876.78,1945 ; v1(876.46,1698.44) 1026.95,1547.95 U1.4@1105.86,1547.95
  Bottom Layer w10: v1@876.78,1698.75 D1.1@876.78,2110.24
CH1-2: C6.2 D2.1 R2.2 U1.5 | length 1024.2
  Top Layer w10: v1(863.86,1598.32) 922.86,1598.32 998.82,1522.36 U1.5@1105.86,1522.36 ; R2.2@974.1,2136.1 975.2,2135 v1@975.2,2016.2 ; C6.2@975.2,1945 v1@975.2,2016.2 ; v1(976,2017) v1@975.2,2016.2
  Bottom Layer w10: v1(863.86,1598.32) 975.2,1709.66 D2.1@975.2,2110.24
CH1-3: C7.2 D3.1 R3.2 U1.6 | length 1105.2
  Top Layer w10: v1(881.86,1511.32) 881.86,1502.32 887.41,1496.77 U1.6@1105.86,1496.77 ; R3.2@1072.52,2136.1 1072.85,2135.77 v1(1072.85,2017) 1073.63,2016.22 C7.2@1073.63,1945
  Bottom Layer w10: v1(881.86,1511.32) 881.86,1545.32 1073.63,1737.08 D3.1@1073.63,2110.24
CH1-4: C8.2 D4.1 R4.2 U1.7 | length 1127
  Top Layer w10: v1(952.86,1438.23) 985.8,1471.18 U1.7@1105.86,1471.18 ; R4.2@1170.95,2136.1 1171.28,2135.77 v1(1171.28,2017) 1172.05,2016.22 C8.2@1172.05,1945
  Bottom Layer w10: v1(952.86,1438.23) 963.15,1438.23 1172.05,1647.14 D4.1@1172.05,2110.24
CH1-5: C9.2 D5.1 R5.2 U1.12 | length 1004.9
  Top Layer w10: R5.2@1269.39,2136.09 v1(1269.39,2017) 1271,2015.39 C9.2@1271,1945 ; U1.12@1357.83,1522.36 v1@1491.9,1522.36
  Bottom Layer w10: D5.1@1270.48,2110.24 1270.48,1861.7 1492.86,1639.32 v1(1492.86,1523.32)
CH1-6: C10.2 D6.1 R6.2 U1.11 | length 1101.2
  Top Layer w10: U1.11@1357.83,1496.77 1443.41,1496.77 1462.86,1477.32 1542.86,1477.32 v1(1556.86,1491.32) ; R6.2@1367.81,2136.09 v1(1367.81,2017) 1368.9,2015.91 C10.2@1368.9,1945
  Bottom Layer w10: D6.1@1368.9,2110.24 1368.9,1855.28 1556.86,1667.32 v1(1556.86,1491.32)
CH1-7: C11.2 D7.1 R7.2 U1.10 | length 1179.7
  Top Layer w10: U1.10@1357.83,1471.18 1427,1471.18 1449.86,1448.32 v1(1613.86,1448.32) ; R7.2@1466.22,2136.1 1466.55,2135.78 v1(1466.55,2017) 1467.33,2016.22 C11.2@1467.33,1945
  Bottom Layer w10: D7.1@1467.33,2110.24 1467.33,1833.85 1613.86,1687.32 v1(1613.86,1448.32)
CH1-8: C12.2 D8.1 R8.2 U1.9 | length 1249.3
  Top Layer w10: U1.9@1357.83,1445.59 1414.59,1445.59 1446.86,1413.32 v1@1664.86,1413.32 ; R8.2@1564.65,2136.1 1564.98,2135.77 v1(1564.98,2017) 1565.75,2016.22 C12.2@1565.75,1945
  Bottom Layer w10: D8.1@1565.75,2110.24 1565.75,1836.43 1651.86,1750.32 1651.86,1428.32 v1(1665.86,1414.32)
CH2: P1.4 U2.8 | length 540.6
  Top Layer w10: U2.8@2053.86,1445.59 2051.86,1443.59 2051.86,1356.32 2095.86,1312.32 v1(2099.86,1312.32)
  Bottom Layer w10: v1(2099.86,1312.32) 2098.86,1311.32 2098.86,1310.32 2238.86,1170.32 2238.86,1123.32 2239.3,1122.88 P1.4@2239.3,986.61
CH2-1: C13.2 D9.1 R9.2 U2.4 | length 893.5
  Top Layer w10: C13.2@1820.88,1945.78 v1(1820.88,2017) R9.2@1820.88,2135.77 ; v1(1836.58,1686.32) 1974.95,1547.95 U2.4@2053.86,1547.95
  Bottom Layer w10: 1820.67,1698.44 D9.1@1820.67,2110.24 ; 1824.46,1698.44 v1(1836.58,1686.32)
CH2-2: C14.2 D10.1 R10.2 U2.5 | length 1020.2
  Top Layer w10: v1(1811.86,1598.32) 1887.82,1522.36 U2.5@2053.86,1522.36 ; C14.2@1919.31,1945.78 v1@1919.31,2016.98 ; v1@1920.08,2016.2 R10.2@1920.08,2135
  Bottom Layer w10: v1(1811.86,1598.32) 1920.12,1706.57 D10.1@1920.12,2110.24
  other v1: 1919.31,2017
CH2-3: C15.2 D11.1 R11.2 U2.6 | length 1096.9
  Top Layer w10: v1(1829.86,1511.32) 1844.41,1496.77 U2.6@2053.86,1496.77 ; C15.2@2017.73,1945.78 v1(2017.73,2017) R11.2@2017.73,2135.77
  Bottom Layer w10: v1(1829.86,1511.32) 2018.12,1699.57 D11.1@2018.12,2110.24
CH2-4: C16.2 D12.1 R12.2 U2.7 | length 1118.2
  Top Layer w10: v1(1900.86,1438.23) 1933.8,1471.18 U2.7@2053.86,1471.18 ; C16.2@2116.16,1945.78 v1(2116.16,2017) R12.2@2116.16,2135.77
  Bottom Layer w10: v1(1900.86,1438.23) 2117.12,1654.49 D12.1@2117.12,2110.24
CH2-5: C17.2 D13.1 R13.2 U2.12 | length 1006.2
  Top Layer w10: v1@2214.27,2017 R13.2@2214.27,2136.09 ; C17.2@2215.11,1945.78 v1@2215.11,2016.17 ; U2.12@2307.83,1522.36 2441.9,1522.36 v1(2442.86,1523.32)
  Bottom Layer w10: D13.1@2215.12,2110.24 2215.12,1867.06 2442.86,1639.32 v1(2442.86,1523.32)
  other v1: 2214.58,2017
CH2-6: C18.2 D14.1 R14.2 U2.11 | length 1101.6
  Top Layer w10: U2.11@2307.83,1496.77 2393.41,1496.77 2412.86,1477.32 2492.86,1477.32 v1(2506.86,1491.32) ; v1@2312.7,2017 R14.2@2312.7,2136.09 ; C18.2@2313.01,1945.78 v1@2313.01,2016.69
  Bottom Layer w10: D14.1@2314.12,2110.24 2314.12,1860.06 2506.86,1667.32 v1(2506.86,1491.32)
  other v1: 2313.01,2017
CH2-7: C19.2 D15.1 R15.2 U2.10 | length 1180.3
  Top Layer w10: U2.10@2307.83,1471.18 2377,1471.18 2399.86,1448.32 v1(2563.86,1448.32) ; C19.2@2411.43,1945.78 v1(2411.43,2017) R15.2@2411.43,2135.78
  Bottom Layer w10: D15.1@2412.12,2110.24 2412.12,1839.06 2563.86,1687.32 v1(2563.86,1448.32)
CH2-8: C20.2 D16.1 R16.2 U2.9 | length 1251.5
  Top Layer w10: U2.9@2307.83,1445.59 2364.59,1445.59 2396.86,1413.32 2614.86,1413.32 v1(2615.86,1414.32) ; C20.2@2509.86,1945.78 v1(2509.86,2017) R16.2@2509.86,2135.77
  Bottom Layer w10: D16.1@2510.12,2110.24 2510.12,1842.06 2601.86,1750.32 2601.86,1428.32 v1(2615.86,1414.32)
CH3: P1.6 U3.8 | length 1030.6
  Top Layer w10: v1(2967.98,1344.28) 3008.86,1385.17 3008.86,1438.59 U3.8@3001.86,1445.59
  Bottom Layer w10: P1.6@2338.86,986.61 2338.86,1203.32 2486.15,1350.61 2961.65,1350.61 v1(2967.98,1344.28)
CH3-1: C21.2 D17.1 R17.2 U3.4 | length 896.2
  Top Layer w10: C21.2@2765.76,1945.77 v1(2765.76,2017) R17.2@2765.76,2135.77 ; v1(2789.8,1681.1) 2922.95,1547.95 U3.4@3001.86,1547.95
  Bottom Layer w10: D17.1@2766.12,2110.24 2766.12,1704.79 v1(2789.8,1681.1)
CH3-2: C22.2 D18.1 R18.2 U3.5 | length 1019
  Top Layer w10: v1(2759.86,1598.32) 2818.86,1598.32 2894.82,1522.36 U3.5@3001.86,1522.36 ; C22.2@2864.19,1945.77 v1@2864.19,2016.97 ; v1@2864.96,2016.2 R18.2@2864.96,2135
  Bottom Layer w10: v1(2759.86,1598.32) 2865.12,1703.57 D18.1@2865.12,2110.24
  other v1: 2864.19,2017
CH3-3: C23.2 D19.1 R19.2 U3.6 | length 1103.1
  Top Layer w10: v1(2777.86,1511.32) 2777.86,1499.32 2780.41,1496.77 U3.6@3001.86,1496.77 ; C23.2@2962.61,1945.77 v1(2962.61,2017) R19.2@2962.61,2135.77
  Bottom Layer w10: v1(2777.86,1511.32) 2964.12,1697.57 D19.1@2964.12,2110.24
CH3-4: C24.2 D20.1 R20.2 U3.7 | length 1044.4
  Top Layer w10: v1(2875.86,1463.32) 2875.86,1465.23 2881.8,1471.18 U3.7@3001.86,1471.18 ; C24.2@3061.04,1945.77 v1(3061.04,2017) R20.2@3061.04,2135.77
  Bottom Layer w10: v1(2875.86,1463.32) 2875.86,1465.23 3062.12,1651.49 D20.1@3062.12,2110.24
CH3-5: C25.2 D21.1 R21.2 U3.12 | length 1007.4
  Top Layer w10: v1@3159.15,2017 R21.2@3159.15,2136.08 ; C25.2@3159.99,1945.77 v1@3159.99,2016.16 ; U3.12@3255.83,1522.36 3389.9,1522.36 v1(3390.86,1523.32)
  Bottom Layer w10: D21.1@3160.24,2110.24 3160.24,1901.35 3390.86,1670.73 v1(3390.86,1523.32)
  other v1: 3159.46,2017
CH3-6: C26.2 D22.1 R22.2 U3.11 | length 1103.3
  Top Layer w10: U3.11@3255.83,1496.77 3341.41,1496.77 3360.86,1477.32 3440.86,1477.32 v1(3454.86,1491.32) ; v1@3257.58,2017 R22.2@3257.58,2136.08 ; C26.2@3257.89,1945.77 v1@3257.89,2016.69
  Bottom Layer w10: D22.1@3258.12,2110.24 3258.12,1864.06 3454.86,1667.32 v1(3454.86,1491.32)
  other v1: 3257.89,2017
CH3-7: C27.2 D23.1 R23.2 U3.10 | length 1181.6
  Top Layer w10: U3.10@3255.83,1471.18 3325,1471.18 3347.86,1448.32 v1(3511.86,1448.32) ; C27.2@3356.31,1945.77 v1(3356.31,2017) R23.2@3356.31,2135.77
  Bottom Layer w10: D23.1@3357.03,2110.24 3357.03,1842.15 3511.86,1687.32 v1(3511.86,1448.32)
CH3-8: C28.2 D24.1 R24.2 U3.9 | length 1252.4
  Top Layer w10: U3.9@3255.83,1445.59 3312.59,1445.59 3344.86,1413.32 3562.86,1413.32 v1(3563.86,1414.32) ; C28.2@3454.74,1945.77 v1(3454.74,2017) R24.2@3454.74,2135.77
  Bottom Layer w10: D24.1@3456.03,2110.24 3456.03,1844.15 3549.86,1750.32 3549.86,1428.32 v1(3563.86,1414.32)
CH4: P1.8 U4.8 | length 1779.5
  Top Layer w10: v1(3829.3,1315.61) 3930.86,1417.17 3930.86,1443.59 U4.8@3928.86,1445.59
  Bottom Layer w10: P1.8@2439.3,986.61 2439.3,1123.76 2621.02,1305.48 3819.17,1305.48 v1(3829.3,1315.61)
CH4-1: C29.2 D25.1 R25.2 U4.4 | length 888.6
  Top Layer w10: C29.2@3710.65,1945.78 v1(3710.65,2017) R25.2@3710.65,2135.77 ; v1(3718.49,1679.42) 3849.95,1547.95 U4.4@3928.86,1547.95
  Bottom Layer w10: D25.1@3711.42,2110.24 3711.42,1686.48 v1(3718.49,1679.42)
CH4-2: C30.2 D26.1 R26.2 U4.5 | length 1026.4
  Top Layer w10: v1(3686.86,1598.32) 3745.86,1598.32 3821.82,1522.36 U4.5@3928.86,1522.36 ; C30.2@3809.07,1945.78 v1@3809.07,2016.98 ; v1@3809.85,2016.2 R26.2@3809.85,2135
  Bottom Layer w10: v1(3686.86,1598.32) 3810.12,1721.57 D26.1@3810.12,2110.24
  other v1: 3809.07,2017
CH4-3: C31.2 D27.1 R27.2 U4.6 | length 1105.5
  Top Layer w10: v1(3704.86,1511.32) 3704.86,1509.32 3717.41,1496.77 U4.6@3928.86,1496.77 ; C31.2@3907.5,1945.78 v1(3907.5,2017) R27.2@3907.5,2135.77
  Bottom Layer w10: v1(3704.86,1511.32) 3908.12,1714.57 D27.1@3908.12,2110.24 ; v1@3907.51,2015.38 v1@3908.32,2014.57
CH4-4: C32.2 D28.1 R28.2 U4.7 | length 1124.1
  Top Layer w10: v1(3775.86,1438.23) 3808.8,1471.18 U4.7@3928.86,1471.18 ; C32.2@4005.92,1945.78 v1(4005.92,2017) R28.2@4005.92,2135.77
  Bottom Layer w10: v1(3775.86,1438.23) 4006.3,1668.68 D28.1@4006.3,2110.24
CH4-5: C33.2 D29.1 R29.2 U4.12 | length 1000.2
  Top Layer w10: v1@4104.04,2017 R29.2@4104.04,2136.09 ; C33.2@4104.87,1945.78 v1@4104.87,2016.17 ; U4.12@4182.83,1522.36 4316.9,1522.36 v1(4317.86,1523.32)
  Bottom Layer w10: D29.1@4105.12,2110.24 4105.12,1852.06 4317.86,1639.32 v1(4317.86,1523.32) ; v1@4105.32,2016.81 v1@4105.51,2017
  other v1: 4104.35,2017
CH4-6: C34.2 D30.1 R30.2 U4.11 | length 1095.4
  Top Layer w10: U4.11@4182.83,1496.77 4268.41,1496.77 4287.86,1477.32 4367.86,1477.32 v1(4381.86,1491.32) ; v1@4202.46,2017 R30.2@4202.46,2136.09 ; C34.2@4202.77,1945.78 v1@4202.77,2016.69
  Bottom Layer w10: D30.1@4204.12,2110.24 4204.12,1845.06 4381.86,1667.32 v1(4381.86,1491.32)
  other v1: 4202.77,2017
CH4-7: C35.2 D31.1 R31.2 U4.10 | length 1173.6
  Top Layer w10: U4.10@4182.83,1471.18 4252,1471.18 4274.86,1448.32 v1(4438.86,1448.32) ; C35.2@4301.2,1945.78 v1(4301.2,2017) R31.2@4301.2,2135.78
  Bottom Layer w10: D31.1@4303.12,2110.24 4303.12,1823.06 4438.86,1687.32 v1(4438.86,1448.32)
CH4-8: C36.2 D32.1 R32.2 U4.9 | length 1244.9
  Top Layer w10: U4.9@4182.83,1445.59 4239.59,1445.59 4271.86,1413.32 4489.86,1413.32 v1(4490.86,1414.32) ; C36.2@4399.62,1945.78 v1(4399.62,2017) R32.2@4399.62,2135.77
  Bottom Layer w10: D32.1@4401.12,2110.24 4401.12,1826.06 4476.86,1750.32 4476.86,1428.32 v1(4490.86,1414.32)
CH5: P1.10 U5.8 | length 2661.2
  Top Layer w10: v1(4813.3,1289.61) 4875.74,1352.05 4875.74,1443.59 U5.8@4873.74,1445.59
  Bottom Layer w10: P1.10@2539.3,986.61 2539.3,1116.61 2702.17,1279.48 3818.45,1279.48 3829.58,1290.61 4814.3,1290.61 v1(4813.3,1289.61)
CH5-1: C37.2 D33.1 R33.2 U5.4 | length 888.6
  Top Layer w10: C37.2@4655.53,1945.78 v1(4655.53,2017) R33.2@4655.53,2135.77 ; v1(4663.37,1679.42) 4794.84,1547.95 U5.4@4873.74,1547.95
  Bottom Layer w10: D33.1@4656.3,2110.24 4656.3,1686.48 v1(4663.37,1679.42)
CH5-2: C38.2 D34.1 R34.2 U5.5 | length 1026.5
  Top Layer w10: v1(4631.74,1598.32) 4690.74,1598.32 4766.7,1522.36 U5.5@4873.74,1522.36 ; C38.2@4753.95,1945.78 v1@4753.95,2016.98 ; v1@4754.73,2016.2 R34.2@4754.73,2135
  Bottom Layer w10: v1(4631.74,1598.32) 4755.12,1721.69 D34.1@4755.12,2110.24
  other v1: 4753.95,2017
CH5-3: C39.2 D35.1 R35.2 U5.6 | length 1104.8
  Top Layer w10: v1(4649.74,1511.32) 4649.74,1509.32 4662.3,1496.77 U5.6@4873.74,1496.77 ; C39.2@4852.38,1945.78 v1(4852.38,2017) R35.2@4852.38,2135.77
  Bottom Layer w10: v1(4649.74,1511.32) 4854.12,1715.69 D35.1@4854.12,2110.24
CH5-4: C40.2 D36.1 R36.2 U5.7 | length 1124.5
  Top Layer w10: v1(4720.74,1438.23) 4753.69,1471.18 U5.7@4873.74,1471.18 ; C40.2@4950.8,1945.78 v1(4950.8,2017) R36.2@4950.8,2135.77
  Bottom Layer w10: v1(4720.74,1438.23) 4952.12,1669.61 D36.1@4952.12,2110.24